# Altium PCB Science.PcbDoc (part 1 of 2)
Units mil, origin at the board's own origin, x right, y up, seen from the top; angles counter-clockwise.
Board outline 8250 x 3500 mil, 2 copper layers (Top Layer, Bottom Layer); 137 components, 126 nets, 701 pads, 227 vias.
Unrouted connection lines stored in the file: 22.
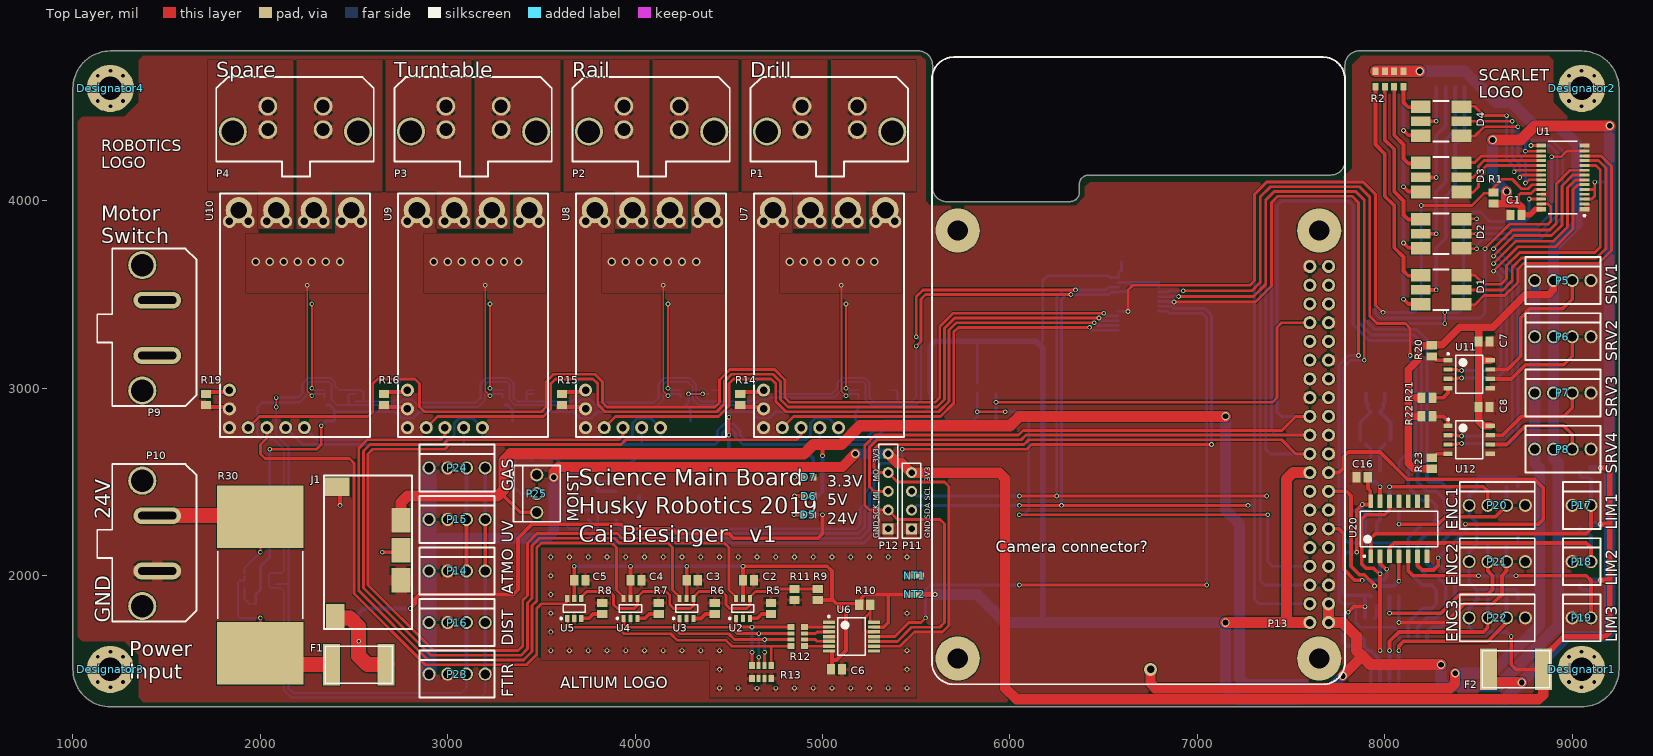
[diagram p0: Top Layer view]
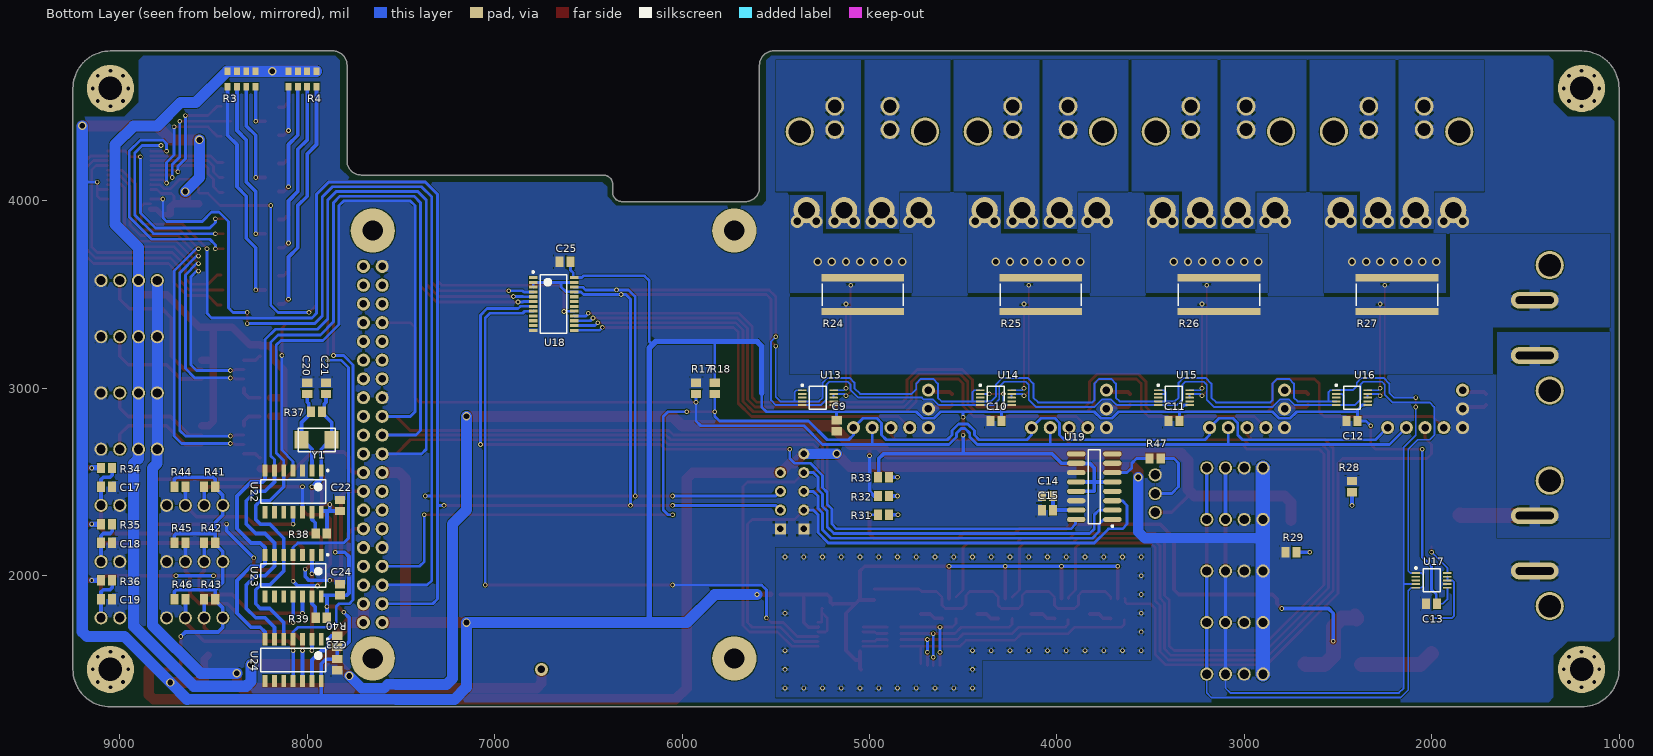
[diagram p1: Bottom Layer view, seen from below]

## Layer stack, top to bottom
Top Solder: solder mask 0.4, Solder Resist, Dk 3.5
Top Layer: signal copper 1.4
Dielectric 1: dielectric 12.6, FR-4, Dk 4.8
Bottom Layer: signal copper 1.4
Bottom Solder: solder mask 0.4, Solder Resist, Dk 3.5

## Board outline
1200,1300 cw(c1200,1500) 1000,1500 1000,4600 cw(c1200,4600) 1200,4800 5511.61,4800 cw(c5511.61,4725) 5586.61,4725 5586.61,4071.06 ccw(c5661.61,4071.06) 5661.61,3996.06 6320.08,3996.06 ccw(c6320.08,4046.06) 6370.08,4046.06 6370.08,4087.8 cw(c6420.08,4087.8) 6420.08,4137.8 7712.4,4137.8 ccw(c7712.4,4212.8) 7787.4,4212.8 7787.4,4725 cw(c7862.4,4725) 7862.4,4800 9050,4800 cw(c9050,4600) 9250,4600 9250,1500 cw(c9050,1500) 9050,1300

## Design rules (kind name [scope] priority, off if disabled: settings)
Clearance [All] p1: gap=5 ignorepadtopadclearanceinfootprint=FALSE except(0: Arc-Hole Track-Hole SMDPad-Hole THPad-Hole Via-Hole Fill-Hole Poly-Hole Region-Hole Text-Hole)
PolygonConnect PolygonConnect_Small [InNet('AGND')] p1: connectstyle=Relief reliefconductorwidth=20 reliefentries=4 polygonreliefangle="90 Angle" airgapwidth=10
PolygonConnect PolygonConnect_Motors [InComponent('U7') Or InComponent('U8') Or InComponent('U9') Or InComponent('U10')] p2: connectstyle=Direct reliefconductorwidth=10 reliefentries=4 polygonreliefangle="90 Angle" airgapwidth=10
PolygonConnect [All] p3: connectstyle=Relief reliefconductorwidth=60 reliefentries=4 polygonreliefangle="90 Angle" airgapwidth=10
RoutingVias [All] p1: holewidth=15 width=25 viastyle="Through Hole" minholewidth=10 minwidth=25 maxholewidth=30 maxwidth=50
SolderMaskExpansion [All] p1: expansion=4
Width Width_5V [InNet('+5')] p1: maxlimit=150 minlimit=10 preferedwidth=80 minimp=50.000000 maximp=50.000000 favimp=50.000000
Width Width_12V [InNet('+12')] p2: maxlimit=150 minlimit=10 preferedwidth=80 minimp=50.000000 maximp=50.000000 favimp=50.000000
Width [All] p3: maxlimit=100 minlimit=10 preferedwidth=20 minimp=50.000000 maximp=50.000000 favimp=50.000000
30 further rules are at their usual default settings.

## Classes and differential pairs
component class SensorInt: C16 C17 C18 C19 C20 C21 C22 C23 C24 P17 P18 P19 P20 P21 P22 R34 R35 R36 R37 R38 R39 R40 R41 R42 R43 R44 R45 R46 U20 U22 U23 U24 Y1
component class SensorExt: C14 C15 P14 P15 P16 P23 P24 P25 R47 U19
component class Science: C25 D5 D6 D7 P11 P12 P13 R31 R32 R33 U18
component class Power: C9 C10 C11 C12 C13 F1 F2 J1 P9 P10 R24 R25 R26 R27 R28 R29 R30 U13 U14 U15 U16 U17
component class Motors: C7 C8 P1 P2 P3 P4 P5 P6 P7 P8 R14 R15 R16 R17 R18 R19 R20 R21 R22 R23 U7 U8 U9 U10 U11 U12
component class Drivers: C1 C2 C3 C4 C5 C6 D1 D2 D3 D4 NT1 NT2 R1 R2 R3 R4 R5 R6 R7 R8 R9 R10 R11 R12 R13 U1 U2 U3 U4 U5 U6

## Components (designator, comment, footprint, x,y, rotation, side; value= is the part's Value field where it differs from the comment)
C1 "Cap" C0805 8700,3925 r0 top value=100nF
C2 "Cap" C0805 4604.53,1975 r180 top value=100nF
C3 "Cap" C0805 4304.53,1975 r180 top value=100nF
C4 "Cap" C0805 4004.53,1975 r180 top value=100nF
C5 "Cap" C0805 3704.53,1975 r180 top value=100nF
C6 "Cap" C0805 5075,1500 r180 top value=100nF
C7 "Cap" C0805 8529.53,3250 r180 top value=100pF
C8 "Cap" C0805 8529.53,2900 r180 top value=100pF
C9 "Cap" C0805 5175,2800 r90 bottom value=100nF
C10 "Cap" C0805 4325,2825 r180 bottom value=100nF
C11 "Cap" C0805 3375,2825 r180 bottom value=100nF
C12 "Cap" C0805 2425,2825 r180 bottom value=100nF
C13 "Cap" C0805 2000,1850 r180 bottom value=100nF
C14 "Cap" C0805 4050,2425 r180 bottom value=10uF
C15 "Cap" C0805 4050,2350 r180 bottom value=100nF
C16 "Cap" C0805 7879.53,2525 r180 top value=100nF
C17 "Cap" C0805 9070.47,2475 r0 bottom value=1uF
C18 "Cap" C0805 9070.47,2175 r0 bottom value=1uF
C19 "Cap" C0805 9070.47,1875 r0 bottom value=1uF
C20 "Cap" C0805 8000,3000 r270 bottom value=18pF
C21 "Cap" C0805 7900,3000 r270 bottom value=18pF
C22 "Cap" C0805 7825,2375 r90 bottom value=100nF
C23 "Cap" C0805 7840,1525 r270 bottom value=100nF
C24 "Cap" C0805 7825,1925 r90 bottom value=100nF
C25 "Cap" C0805 6625,3675 r180 bottom value=100nF
D1 "RGB_LED" SLV6A-FKB 8300,3525 r180 top
D2 "RGB_LED" SLV6A-FKB 8300,3825 r180 top
D3 "RGB_LED" SLV6A-FKB 8300,4125 r180 top
D4 "RGB_LED" SLV6A-FKB 8300,4425 r180 top
D5 "LED0" 1608[0603] 4922.44,2325 r0 top
D6 "LED0" 1608[0603] 4925,2425 r0 top
D7 "LED0" 1608[0603] 4925,2525 r0 top
Designator1 "Comment" HOLE-M3 9050,1500 r0 top
Designator2 "Comment" HOLE-M3 9050,4600 r0 top
Designator3 "Comment" HOLE-M3 1200,1500 r0 top
Designator4 "Comment" HOLE-M3 1200,4600 r0 top
F1 "2A" 2920 2525,1525 r180 top
F2 "1A" 2920 8700,1500 r0 top
J1 "OKI-T/3-W40" OKI-T/3-W40 2750,2135 r90 top
NT1 "NETTIE-SMT2-W0.8L2.0(MM)" NETTIE-SMT2-W0.8L2.0(MM) 5500,2000 r0 top net-tie
NT2 "NETTIE-SMT2-W0.8L2.0(MM)" NETTIE-SMT2-W0.8L2.0(MM) 5500,1900 r0 top net-tie
P1 "Drill Motor" Sabre-2pos 5185,4380 r0 top
P2 "Rail Motor" Sabre-2pos 4235,4380 r0 top
P3 "Turntable Motor" Sabre-2pos 3285,4380 r0 top
P4 "Motor 4" Sabre-2pos 2335,4380 r0 top
P5 "Servo 1" 22-23-20x1-4pos 8800,3575 r180 top
P6 "Servo 2" 22-23-20x1-4pos 8800,3275 r180 top
P7 "Servo 3" 22-23-20x1-4pos 8800,2975 r180 top
P8 "Servo 4" 22-23-20x1-4pos 8800,2675 r180 top
P9 "Motor Power Switch" SuperSabre-2pos 1380,3175 r270 top
P10 "Power Input" SuperSabre-2pos 1380,2025 r270 top
P11 "I2C Test" HDR1X4 5475,2250 r90 top
P12 "SPI Test" HDR1X5 5350,2250 r90 top
P13 "RPi Header" RPi-3B+ 7650,2700 r270 top
P14 "Atmospheric (BME280)" 22-23-20x1-4pos 2900,2025 r180 top
P15 "UV (VEML6070)" 22-23-20x1-4pos 2900,2300 r180 top
P16 "Dist (VL53L0X)" 22-23-20x1-4pos 2900,1750 r180 top
P17 "LimSw 1" 22-23-20x1-2pos 9000,2375 r180 top
P18 "LimSw 2" 22-23-20x1-2pos 9000,2075 r180 top
P19 "LimSw 3" 22-23-20x1-2pos 9000,1775 r180 top
P20 "Encoder 1" 22-23-20x1-4pos 8450,2375 r180 top
P21 "Encoder 2" 22-23-20x1-4pos 8450,2075 r180 top
P22 "Encoder 3" 22-23-20x1-4pos 8450,1775 r180 top
P23 "FTIR (SWS62231)" 22-23-20x1-4pos 2900,1475 r180 top
P24 "Gas (iAQ-Core)" 22-23-20x1-4pos 2900,2575 r180 top
P25 "Header 3" 22-23-20x1-3pos 3475,2338 r270 top
R1 "Res3" C0805 8580,4015 r90 top value=10K
R2 "RESNET_4" 744C083 8025,4650 r270 top value=150
R3 "RESNET_4" 744C083 8350,4650 r270 bottom value=100
R4 "RESNET_4" 744C083 8025,4650 r270 bottom value=100
R5 "Res3" C0805 4725,1825 r90 top value=156,250
R6 "Res3" C0805 4425,1825 r90 top value=156,250
R7 "Res3" C0805 4125,1825 r90 top value=156,250
R8 "Res3" C0805 3825,1825 r90 top value=156,250
R9 "Res3" C0805 4975,1900 r90 top value=976
R10 "Res3" C0805 5225,1844.69 r180 top value=10K
R11 "Res3" C0805 4850,1900 r270 top value=182
R12 "RESNET_4" CAY16F4 4868,1675 r0 top value=15K
R13 "RESNET_4" CAY16F4 4675,1485.63 r90 top value=10K
R14 "Res3" C0805 4560,2940 r270 top value=47K
R15 "Res3" C0805 3610,2940 r270 top value=100K
R16 "Res3" C0805 2660,2940 r270 top value=47K
R17 "Res3" C0805 5925,3000 r270 bottom value=10K
R18 "Res3" C0805 5825,3000 r90 bottom value=10K
R19 "Res3" C0805 1710,2940 r270 top value=47K
R20 "Res3" C0805 8250,3200 r270 top value=1.8K
R21 "Res3" C0805 8225,2950 r0 top value=1.8K
R22 "Res3" C0805 8225,2850 r0 top value=1.8K
R23 "Res3" C0805 8250,2600 r90 top value=1.8K
R24 "Res3" FCSL110 5035,3500 r270 bottom value=5m
R25 "Res3" FCSL110 4085,3500 r270 bottom value=5m
R26 "Res3" FCSL110 3135,3500 r270 bottom value=5m
R27 "Res3" FCSL110 2185,3500 r270 bottom value=5m
R28 "Res3" C0805 2425,2475 r270 bottom value=10K
R29 "Res3" C0805 2750,2125 r180 bottom value=1.47K
R30 "Res3" RW5S0 2000,1950 r90 top value=100m
R31 "Res3" C0805 4925,2325 r0 bottom value=1.2K
R32 "Res3" C0805 4925,2425 r0 bottom value=180
R33 "Res3" C0805 4925,2525 r0 bottom value=68
R34 "Res3" C0805 9070.47,2575 r180 bottom value=5K
R35 "Res3" C0805 9070.47,2275 r180 bottom value=5K
R36 "Res3" C0805 9070.47,1975 r180 bottom value=5K
R37 "Res3" C0805 7950,2875 r180 bottom value=1M
R38 "Res3" C0805 7925,2225 r0 bottom value=10K
R39 "Res3" C0805 7925,1775 r0 bottom value=10K
R40 "Res3" C0805 7840,1650 r90 bottom value=10K
R41 "Res3" C0805 8520.47,2475 r180 bottom value=10K
R42 "Res3" C0805 8520.47,2175 r180 bottom value=10K
R43 "Res3" C0805 8520.47,1875 r180 bottom value=10K
R44 "Res3" C0805 8679.53,2475 r0 bottom value=10K
R45 "Res3" C0805 8679.53,2175 r0 bottom value=10K
R46 "Res3" C0805 8679.53,1875 r0 bottom value=10K
R47 "Res3" C0805 3475,2625 r180 bottom value=100
U1 "PCA9685PW,118" SOT361-1_V 8950,4125 r180 top
U2 "LTC6992" LTC6992 4575,1825 r90 top
U3 "LTC6992" LTC6992 4275,1825 r90 top
U4 "LTC6992" LTC6992 3975,1825 r90 top
U5 "LTC6992" LTC6992 3675,1825 r90 top
U6 "4ch DAC" MAX5715 5153.63,1675 r0 top
U7 "Pololu G2 HPMD" Pololu-HPMDG2-SCIENCE 5335,3950 r180 top
U8 "Pololu G2 HPMD" Pololu-HPMDG2-SCIENCE 4385,3950 r180 top
U9 "Pololu G2 HPMD" Pololu-HPMDG2-SCIENCE 3435,3950 r180 top
U10 "Pololu G2 HPMD" Pololu-HPMDG2-SCIENCE 2485,3950 r180 top
U11 "ACPL-064L-500E" ACPL-064L 8450,3075 r0 top
U12 "ACPL-064L-500E" ACPL-064L 8450,2725 r0 top
U13 "INA226AIDGSR" DGS0010A_L 5275,2950 r180 bottom
U14 "INA226AIDGSR" DGS0010A_L 4325,2950 r180 bottom
U15 "INA226AIDGSR" DGS0010A_L 3375,2950 r180 bottom
U16 "INA226AIDGSR" DGS0010A_L 2425,2950 r180 bottom
U17 "INA226AIDGSR" DGS0010A_L 2000,1975 r180 bottom
U18 "PCA9535EDTR2G" ONSC-TSSOP-24-948H_V 6685,3450 r180 bottom
U19 "TLV2544ID" TI-D16_M 3800,2475 r0 bottom
U20 "SN74HC14NSR" NS0014A_M 8075,2250 r90 top
U22 "LS7366R" SOIC14N 8075,2450 r270 bottom
U23 "LS7366R" SOIC14N 8075,2000 r270 bottom
U24 "LS7366R" SOIC14N 8075,1550 r270 bottom
Y1 "20MHz" ABM3 7950,2725 r0 bottom

## Footprints (in the part's own frame and the unit in brackets; to place one, negate y for a bottom-side part, rotate by r counter-clockwise, add the part's x,y. Pads: shape width x height; smd on the part's side, far side on the other; paste and mask are expansions set on the pad)
22-23-20x1-2pos [mil]
  round 70 hole 50: 1(0,0) 2(-100,0)
  silkscreen extent -150,-125 50,125
22-23-20x1-3pos [mil]
  round 70 hole 50: 1(0,0) 2(-100,0) 3(-200,0)
  silkscreen extent -250,-125 50,125
22-23-20x1-4pos [mil]
  round 70 hole 50: 1(0,0) 2(-100,0) 3(-200,0) 4(-300,0)
  silkscreen extent -350,-125 50,125
744C083 [mm] "Chip Array, Concave, 8-Leads, Pitch 1.27mm,  Body 5.08x2.00mm,  IPC Medium Density"
  rect 1.05x0.8 smd: 1(-1.05,1.905) 2(-1.05,0.635) 3(-1.05,-0.635) 4(-1.05,-1.905) 5(1.05,-1.905) 6(1.05,-0.635) 7(1.05,0.635) 8(1.05,1.905)
  body extent -1.15,-2.64 1.15,2.64, height 0.8
1608[0603] [mm] "Chip Capacitor, Body 1.6x0.8mm, IPC High Density"
  rect 0.8x0.9 smd: 1(-0.7,0) 2(0.7,0)
  body extent -0.87,-0.48 0.87,0.48, height 1.3
2920 [mm]
  rect 2.3x5.6 smd: 1(-3.7,0) 2(3.7,0)
  silkscreen extent -4.55,-2.5 4.55,2.5
ABM3 [mm]
  rect 1.9x2.4 smd: 1(-2.05,0) 2(2.05,0)
  silkscreen extent -2.5,-1.6 2.5,1.6
ACPL-064L [mm] "SOIC, 8-Leads, Body 5.08x3.93mm, Pitch 1.27mm, IPC Medium Density"
  rect 1.25x0.6 smd: 1(-2.85,1.905) 2(-2.85,0.635) 3(-2.85,-0.635) 4(-2.85,-1.905) 5(2.85,-1.905) 6(2.85,-0.635) 7(2.85,0.635) 8(2.85,1.905)
  silkscreen extent -2.97,-2.6 1.82,2.88, body extent -3,-2.6 3,2.6, height 3.2
C0805 [mm] "Chip Capacitor, Body 2.0x1.3mm, IPC High Density"
  rect 1.1x1.4 smd: 1(-0.75,0) 2(0.75,0)
  body extent -1.1,-0.72 1.1,0.72, height 1.4
CAY16F4 [mm]
  rect 0.95x0.8 smd: 1(-0.9,1.3) 4(-0.9,-1.3) 5(0.9,-1.3) 8(0.9,1.3)
  rect 0.95x0.55 smd: 2(-0.9,0.4) 3(-0.9,-0.4) 6(0.9,-0.4) 7(0.9,0.4)
  body extent -0.95,-1.7 0.95,1.7, height 0.6
DGS0010A_L [mm] "SOP, 10-Leads, Body 3.1x3.1mm, Pitch 0.5mm, IPC High Density"
  rrect40% 1.15x0.25 smd: 1(-2.125,1) 2(-2.125,0.5) 3(-2.125,0) 4(-2.125,-0.5) 5(-2.125,-1) 6(2.125,-1) 7(2.125,-0.5) 8(2.125,0) 9(2.125,0.5) 10(2.125,1)
  silkscreen extent -2.25,-1.55 1.15,1.8, body extent -2.45,-1.5 2.45,1.5, height 0.94
FCSL110 [mm]
  rect 1x11.2 smd: 1(-2.3,0) 2(2.3,0)
  silkscreen extent -1.5,-5.5 1.5,5.5
HDR1X4 [mm] "Connector; Header; 4 Position"
  rect 1.5x1.5 hole 0.9: 1(0,0)
  round 1.5 hole 0.9: 2(2.54,0) 3(5.08,0) 4(7.62,0)
  silkscreen extent -1.27,-1.27 8.89,1.27
HDR1X5 [mm] "Connector; Header; 5 Position"
  rect 1.5x1.5 hole 0.9: 1(0,0)
  round 1.5 hole 0.9: 2(2.54,0) 3(5.08,0) 4(7.62,0) 5(10.16,0)
  silkscreen extent -1.27,-1.27 11.43,1.27
HOLE-M3 [mm]
  round 0.8 hole 0.5: ""(-2.4,0) ""(-1.697,-1.697) ""(-1.697,1.697) ""(0,-2.4) ""(0,2.4) ""(1.697,-1.697) ""(1.697,1.697) ""(2.4,0)
  round 6.4 hole 3.2: ""(0,0)
LTC6992 [mm] "SOT23, 6-Leads, Body 2.90x2.80mm, Pitch 0.95mm, IPC Medium Density"
  rect 0.95x0.55 smd: 1(-1.35,0.95) 2(-1.35,0) 3(-1.35,-0.95) 4(1.35,-0.95) 5(1.35,0) 6(1.35,0.95)
  silkscreen extent -1.47,-1.5 0.5,1.9, body extent -1.45,-1.5 1.45,1.5, height 1
MAX5715 [mm] "TSOP, 14-Leads, Body 5.00x4.40mm, Pitch 0.65mm, IPC Low Density"
  rect 1.6x0.45 smd: 1(-3.05,1.95) 2(-3.05,1.3) 3(-3.05,0.65) 4(-3.05,0) 5(-3.05,-0.65) 6(-3.05,-1.3) 7(-3.05,-1.95) 8(3.05,-1.95) 9(3.05,-1.3) 10(3.05,-0.65) 11(3.05,0) 12(3.05,0.65) 13(3.05,1.3) 14(3.05,1.95)
  silkscreen extent -3.17,-2.55 1.85,2.85, body extent -3.2,-2.55 3.2,2.55, height 1.1
NETTIE-SMT2-W0.8L2.0(MM) [mil] "Net-Tie, Surface Mount, 2.0mm x 0.8mm, 2 Pads(1.2mm x 0.8mm)"
  rect 52x31.5 smd paste-52 mask-19.68: 1(-35.08,0.24) 2(16.1,0.24)
NS0014A_M [mm] "SOIC,14-Leads,Body 10.5x5.6mm,Pitch 1.27mm,IPC Low Density"
  rrect15% 1.85x0.65 smd: 1(-3.725,3.81) 2(-3.725,2.54) 3(-3.725,1.27) 4(-3.725,0) 5(-3.725,-1.27) 6(-3.725,-2.54) 7(-3.725,-3.81) 8(3.725,-3.81) 9(3.725,-2.54) 10(3.725,-1.27) 11(3.725,0) 12(3.725,1.27) 13(3.725,2.54) 14(3.725,3.81)
  silkscreen extent -3.85,-5.25 2.4,5.25, body extent -2.8,-5.25 2.8,5.25, height 2
OKI-T/3-W40 [mil]
  rect 100x130 smd: 1(340,340)
  rect 130x100 smd: 2(-350,350) 3(-160,0) 4(0,0) 5(160,0)
  silkscreen extent -420,-60 400,410
ONSC-TSSOP-24-948H_V [mm] "SOP, 24-Leads, Body 7.9x4.5mm, Pitch 0.65mm"
  rect 1.15x0.42 smd: 1(-2.775,3.575) 2(-2.775,2.925) 3(-2.775,2.275) 4(-2.775,1.625) 5(-2.775,0.975) 6(-2.775,0.325) 7(-2.775,-0.325) 8(-2.775,-0.975) 9(-2.775,-1.625) 10(-2.775,-2.275) 11(-2.775,-2.925) 12(-2.775,-3.575) 13(2.775,-3.575) 14(2.775,-2.925) 15(2.775,-2.275) 16(2.775,-1.625) 17(2.775,-0.975) 18(2.775,-0.325) 19(2.775,0.325) 20(2.775,0.975) 21(2.775,1.625) 22(2.775,2.275) 23(2.775,2.925) 24(2.775,3.575)
  silkscreen extent -2.9,-3.95 1.8,4.46, body extent -2.25,-3.95 2.25,3.95, height 1.2
Pololu-HPMDG2-SCIENCE [mil]
  round 70 hole 40: 1(650,1160) 2(550,1160) 3(450,1160) 4(350,1160) 5(250,1160) 9(650,1060) 10(650,960) 13(550,60) 13(650,60) 14(350,60) 14(450,60) 15(150,60) 15(250,60) 16(-50,60) 16(50,60)
  round 140 hole 90: 13(600,0) 14(400,0) 15(200,0) 16(0,0)
  silkscreen extent -100,-90 700,1210
RPi-3B+ [mil]
  round 70 hole 40: 1(950,-50) 2(950,50) 3(850,-50) 4(850,50) 5(750,-50) 6(750,50) 7(650,-50) 8(650,50) 9(550,-50) 10(550,50) 11(450,-50) 12(450,50) 13(350,-50) 14(350,50) 15(250,-50) 16(250,50) 17(150,-50) 18(150,50) 19(50,-50) 20(50,50) 21(-50,-50) 22(-50,50) 23(-150,-50) 24(-150,50) 25(-250,-50) 26(-250,50) 27(-350,-50) 28(-350,50) 29(-450,-50) 30(-450,50) 31(-550,-50) 32(-550,50) 33(-650,-50) 34(-650,50) 35(-750,-50) 36(-750,50) 37(-850,-50) 38(-850,50) 39(-950,-50) 40(-950,50)
  round 236.22 hole 108.27: ""(-1141.73,0) ""(-1141.73,-1929.13) ""(1141.73,0) ""(1141.73,-1929.13)
  silkscreen extent -2067,-2067 1280,138
RW5S0 [mm] "Chip Resistor, 2-Leads, Body 20.50x9.20mm, IPC Low Density"
  rect 8.5x11.7 smd: 1(-9.25,0) 2(9.25,0)
  silkscreen extent -4.6,-5.75 4.6,5.75, body extent -10.5,-4.85 10.5,4.85, height 10.8
Sabre-2pos [mil]
  round 100 hole 70: 1(0,0) 1(0,125) 2(-295,0) 2(-295,125)
  round 150 hole 120: ""(-482,-10) ""(187,-10)
  silkscreen extent -570,-250 270,280
SLV6A-FKB [mm]
  rect 2.7x1.7 smd: 1(-2.75,1.975) 3(-2.75,-1.975) 4(2.75,-1.975) 6(2.75,1.975)
  rect 2.7x1.3 smd: 2(-2.75,0) 5(2.75,0)
  silkscreen extent -1,-2.75 1,2.75
SOIC14N [mm]
  rect 1.65x0.65 smd: 1(-2.825,3.81) 2(-2.825,2.54) 3(-2.825,1.27) 4(-2.825,0) 5(-2.825,-1.27) 6(-2.825,-2.54) 7(-2.825,-3.81) 8(2.825,-3.81) 9(2.825,-2.54) 10(2.825,-1.27) 11(2.825,0) 12(2.825,1.27) 13(2.825,2.54) 14(2.825,3.81)
  silkscreen extent -2.95,-4.4 1.6,4.81, body extent -3,-4.4 3,4.4, height 1.8
SOT361-1_V [mm] "SOP, 28-Leads, Body 9.7x4.4mm, Pitch 0.65mm, NXP Recommended"
  rect 1.35x0.6 smd: 1(-2.925,4.325) 14(-2.925,-4.325) 15(2.925,-4.325) 28(2.925,4.325)
  rect 1.35x0.4 smd: 2(-2.925,3.575) 3(-2.925,2.925) 4(-2.925,2.275) 5(-2.925,1.625) 6(-2.925,0.975) 7(-2.925,0.325) 8(-2.925,-0.325) 9(-2.925,-0.975) 10(-2.925,-1.625) 11(-2.925,-2.275) 12(-2.925,-2.925) 13(-2.925,-3.575) 16(2.925,-3.575) 17(2.925,-2.925) 18(2.925,-2.275) 19(2.925,-1.625) 20(2.925,-0.975) 21(2.925,-0.325) 22(2.925,0.325) 23(2.925,0.975) 24(2.925,1.625) 25(2.925,2.275) 26(2.925,2.925) 27(2.925,3.575)
  silkscreen extent -3.05,-4.9 1.96,5.3, body extent -2.2,-4.85 2.2,4.85, height 1.1
SuperSabre-2pos [mil]
  oval 90x255 hole 40 slot 205 at 90 deg: 1(0,70) 2(-295,70)
  round 150 hole 120: ""(-482,-10) ""(187,-10)
  silkscreen extent -570,-250 270,280
TI-D16_M [mm] "SOIC, 16-Leads, Body 9.9x3.9mm, Pitch 1.27mm, IPC Low Density"
  oval 2.5x0.7 smd: 1(-2.45,4.445) 2(-2.45,3.175) 3(-2.45,1.905) 4(-2.45,0.635) 5(-2.45,-0.635) 6(-2.45,-1.905) 7(-2.45,-3.175) 8(-2.45,-4.445) 9(2.45,-4.445) 10(2.45,-3.175) 11(2.45,-1.905) 12(2.45,-0.635) 13(2.45,0.635) 14(2.45,1.905) 15(2.45,3.175) 16(2.45,4.445)
  silkscreen extent -2.57,-5 0.8,5.47, body extent -2,-5 2,5, height 1.75

## Part data
C1 C2 C3 C4 C5 C6 C7 C8 C9 C10 C11 C12 C13 C14 C15 C16 C17 C18 C19 C20 C21 C22 C23 C24 C25: "Capacitor", LatestRevisionDate=17-Jul-2002, LatestRevisionNote="Re-released for DXP Platform.", PackageDescription="Radial Cap, Thru-Hole; 2 Leads; 0.3 in Pin Spacing", PackageReference=RAD-0.3, Published=8-Jun-2000, Publisher="Altium Limited"
D1 D2 D3 D4: "RGB LED"
D5 D6 D7: "Typical INFRARED GaAs LED", LatestRevisionDate=08-Jul-2005, LatestRevisionNote="Mech Layer 1 removed.", PackageDescription="LED; 2 Leads", PackageReference=LED-0, Published=8-Jun-2000, Publisher="Altium Limited"
F1 F2: library part "Fuse Thermal", "Thermal Fuse", LatestRevisionDate=17-Jul-2002, LatestRevisionNote="Re-released for DXP Platform.", PackageDescription="Thru-Hole; 2 Leads", PackageReference=PIN-W2/E2.8, Published=24-Mar-1999, Publisher="Altium Limited"
J1: "Adjustable Output 3-Amp DOSA-SMT DC/DC Converters", ComponentLink1Description=Datasheet, ComponentLink1URL=https://power.murata.com/data/power/oki-t3-w40.pdf
NT1 NT2: library part CMP-0488-00002-2, "Net-Tie, Surface Mount, 2.0 mm x 0.8 mm, 2 Pads (1.2 mm x 0.8 mm)", Manufacturer="No Vendor", PartNumber=NETTIE-SMT2-W0.8L2.0(MM)
P1 P2 P3 P4 P9 P10 P17 P18 P19: library part "Header 2", "Header, 2-Pin", LatestRevisionDate=17-Jul-2002, LatestRevisionNote="Re-released for DXP Platform.", Publisher="Altium Limited"
P5 P6 P7 P8 P11 P14 P15 P16 P20 P21 P22 P23 P24: library part "Header 4", "Header, 4-Pin", LatestRevisionDate=17-Jul-2002, LatestRevisionNote="Re-released for DXP Platform.", Publisher="Altium Limited"
P12: library part "Header 5", "Header, 5-Pin", LatestRevisionDate=17-Jul-2002, LatestRevisionNote="Re-released for DXP Platform.", Publisher="Altium Limited"
P13: library part "Header 20X2", "Header, 20-Pin, Dual row", LatestRevisionDate=17-Jul-2002, LatestRevisionNote="Re-released for DXP Platform.", Publisher="Altium Limited"
P25: "Header, 3-Pin", LatestRevisionDate=17-Jul-2002, LatestRevisionNote="Re-released for DXP Platform.", Publisher="Altium Limited"
R1 R5 R6 R7 R8 R9 R10 R11 R14 R15 R16 R17 R18 R19 R20 R21 R22 R23 R24 R25 R26 R27 R28 R29 R30 R31 R32 R33 R34 R35 R36 R37 R38 R39 R40 R41 R42 R43 R44 R45 R46 R47: "Resistor", LatestRevisionDate=29-May-2009, LatestRevisionNote="IPC-7351 Footprint Added.", PackageDescription="Chip Resistor", PackageReference=J1-0603, Published=8-Jun-2000, Publisher="Altium Limited"
R2 R3 R4 R12 R13: "4-Resistor Network"
U1: library part CMP-1595-00003-2, "16-Channel, 12-Bit PWM Fm+ I2C-Bus LED Controller, 2.3 to 5.5 V, -40 to 85 degC, 28-Pin TSSOP (SOT361-1), RoHS, Tape and Reel", Frequency="25000000 Hz", PartNumber=PCA9685, Supply Current Max="10 mA", Supply Voltage Max="5.5 V", Supply Voltage Min="2.3 V", Temperature Max="85 degC", Temperature Min="-40 degC", Code_JEDEC=MO-153, ComponentLink1Description="Manufacturer URL", ComponentLink1URL=http://www.nxp.com/, ComponentLink2Description=Datasheet, ComponentLink2URL=http://www.nxp.com/documents/data_sheet/PCA9685.pdf, ComponentLink3Description="Package Specification", ComponentLink3URL=http://www.nxp.com/documents/outline_drawing/sot361-1_po.pdf, DatasheetVersion="Rev. 4", Mounting Technology="Surface Mount", PackageDescription="28-Pin Small Outline Package, Body 9.7 x 4.4 mm, Pitch 0.65 mm", PackageVersion=02/2003, Packing="Tape and Reel", RoHS=TRUE
U2 U3 U4 U5: "Voltage-Controlled Pulse  / Width Modulator (PWM)"
U6: library part MAX5715, "Ultra-Small, Quad-Channel, 8-/10-/12-Bit Buffered  / Output DACs with Internal Reference and SPI Interface"
U7 U8 U9 U10: library part Pololu-G2HPMD, "Discrete MOSFET H-bridge", ComponentLink1Description=Website, ComponentLink1URL=https://www.pololu.com/product/2995
U11 U12: "Low-Power 10-MBd Digital CMOS Optocouplers"
U13 U14 U15 U16 U17: library part CMP-0704-00058-2, "High-Side Measurement, Bi-Directional Current / Power Monitor with I2C Interface, 2.7 to 5.5 V, -40 to 125 degC, 10-pin SOP (DGS10), Green (RoHS & no Sb/Br)", Quiescent Current (+/-)(Typ)(mA)=0.33, Rating=Catalog, CMRR(Min)(dB)=126, Code_JEDEC=MO-153, Common Mode Range(Max)(V)=36, Common Mode Range(Min)(V)=0, ComponentLink1Description="Manufacturer URL", ComponentLink1URL=http://www.ti.com/, ComponentLink2Description=Datasheet, ComponentLink2URL=http://www.ti.com/general/docs/lit/getliterature.tsp?genericPartNumber=INA226&fileType=pdf, ComponentLink3Description="Package Specification", ComponentLink3URL=http://www.ti.com/lit/ml/mpds035b/mpds035b.pdf, DatasheetVersion=SBOS547, Eco-Plan="Green (RoHS & no Sb/Br)", Gain(V/V)=1, Input Offset (+/-)(Max)(uV)=10, Input Offset Drift (+/-)(Max)(uV/Degrees Celsius)=0.1, Mounting Technology="Surface Mount", PackageDescription="10-Pin Plastic Small Outline, Body 3 x 3 mm, Pitch 0.5 mm", PackageReference=DGS0010A, PackageVersion="4073272/C, 02/2004", PartNumber=INA226AIDGSR, Small-Signal Bandwidth(Typ)(MHz)=0.007, SubFamily="Current Shunt Monitor", Vs(Max)(V)=5.5, Vs(Min)(V)=2.7
U18: library part CMP-1316-00043-1, "16-Bit Low-Power I/O Expander for I2C Bus with Interrupt, 1.65 to 5.5 V, -55 to 125 degC, 24-Pin TSSOP, Pb-Free, Tape and Reel", Manufacturer="On Semiconductor", ComponentLink1Description="Manufacturer URL", ComponentLink1URL=http://www.onsemi.com/, ComponentLink2Description=Datasheet, ComponentLink2URL=http://www.onsemi.com/pub_link/Collateral/PCA9535E-D.PDF, ComponentLink3Description="Package Specification", ComponentLink3URL=http://www.onsemi.cn/pub_link/Collateral/948H-01.PDF, DatasheetVersion="Rev. 5", I/O=16, LED Blink/PWM=No, Mounting Technology="Surface Mount", PackageDescription="24-Pin Small Outline Package, Body 7.8 x 4.4 mm, Pitch 0.65 mm", PackageReference=TSSOP-24-948H, PackageVersion="Rev. B, 06/2012", Packing="Tape and Reel", PartNumber=PCA9535EDTR2G, RoHS=TRUE, VCC Max (V)=5.5, VCC Min (V)=1.65
U19: library part CMP-0003-01025-2, "12-Bit 200 kSPS ADC Serial Out, Auto Power Down (Software and Hardware), Low Power with 8 x FIFO with 4 Channel, -40 to 85 degC, 16-pin SOIC (D16), Green (RoHS & no Sb/Br)", Analog Voltage AV/DD(Max)(V)=5.5, Analog Voltage AV/DD(Min)(V)=2.7, Manufacturer="Texas Instruments", # Input Channels=4, Architecture=SAR, Code_JEDEC=MS-012, ComponentLink1Description="Manufacturer URL", ComponentLink1URL=http://www.ti.com/, ComponentLink2Description=Datasheet, ComponentLink2URL=http://www.ti.com/general/docs/lit/getliterature.tsp?genericPartNumber=TLV2544&fileType=pdf, ComponentLink3Description="Package Specification", ComponentLink3URL=http://www.ti.com/litv/pdf/mpds178g, DatasheetVersion=SLAS198E, Digital Supply(Max)(V)=5.5, Digital Supply(Min)(V)=2.7, Eco-Plan="Green (RoHS & no Sb/Br)", ENOB(Bits)=11.6, INL(Max)(+/-LSB)=1, Interface="Serial SPI", Mounting Technology="Surface Mount", PackageDescription="16-Pin Plastic Small Outline, Body 9.9 x 3.9 mm, Pitch 1.27 mm", PackageReference=D16, PackageVersion="4040047-6/M, 06/2011", PartNumber=TLV2544ID, Resolution(Bits)=12, Sample Rate (max)(SPS)=200k, SFDR(dB)=84, SINAD(dB)=70, SubFamily="Precision ADC (<=10MSPS)"
U20: library part CMP-1615-00079-5, "Hex Schmitt-Trigger Inverters, NS0014A, LARGE T&R", F @ Nom Voltage(Max)(Mhz)=20, Generic Part Number=SN74HC14, ICC @ Nom Voltage(Max)(mA)=0.02, Manufacturer="Texas Instruments", Operating Temperature Range(C)="-40 to 85", Rating=Catalog, tpd @ Nom Voltage(Max)(ns)=31, Voltage(Nom)(V)=5, Bits(#)=6, DatasheetVersion=SCLS085G, Input Type=CMOS, Output Drive (IOL/IOH)(Max)(mA)=-4/4, Output Type=CMOS, PackageReference=NS0014A, Schmitt Trigger=Yes, Technology Family=HC, VCC(Max)(V)=6, VCC(Min)(V)=2
U22 U23 U24: "32-BIT QUADRATURE COUNTER WITH SERIAL INTERFACE", ComponentLink1Description=Datasheet, ComponentLink1URL=https://lsicsi.com/pdfs/Data_Sheets/LS7366R.pdf
Y1: library part XTAL, "Crystal Oscillator", LatestRevisionDate=17-Jul-2002, LatestRevisionNote="Re-released for DXP Platform.", PackageDescription="Crystal, Thru-Hole; 2 Leads; Body 3.1 x 8.2 mm (Dia.xH)", PackageReference=R38, Published=8-Jun-2000, Publisher="Altium Limited"

## Via types
v1: diameter 25, hole 15, Top Layer to Bottom Layer, 184 vias
v2: diameter 45, hole 29, Top Layer to Bottom Layer, 28 vias
v3: diameter 45, hole 30, Top Layer to Bottom Layer, 11 vias
v4: diameter 25, hole 15, Top Layer to Bottom Layer, tented both sides, 2 vias
v5: diameter 70, hole 40, Top Layer to Bottom Layer, 1 vias
v6: diameter 45, hole 30, Top Layer to Bottom Layer, tented both sides, 1 vias

## Nets (pads, with @x,y where several pads share a name; then routed paths per layer and width w, separated by ;. In a path a pad name is that pad's centre, name@x,y a point inside that pad or via, vN(x,y) a via of type N, cw(c..) or ccw(c..) an arc to the next point about the centre after c; other vN are vias at no path point)
24V_IN: P9.1 P10.2 R30.2 U17.10 | length 577.4
  Top Layer w10: v1(2000,2125) R30.2@2000,2155
  Top Layer w80: P10.2@1450,2320 1845,2320 R30.2@1850,2325
  Bottom Layer w10: U17.10@1916.34,2014.37 1916.34,2041.34 v1(2000,2125)
+3.3: C1.2 C9.2 C10.2 C11.2 C12.2 C13.2 C16.1 C22.1 C23.1 C24.1 C25.2 F2.1 NT2.2 P13.1 P13.17 R1.1 R18.2 R33.2 R38.1 R39.1 R40.1 U1.3 U1.5 U1.24 U1.28 U13.6 U14.2 U14.6 U15.6 U16.6 U17.6 U18.24 U19.5 U19.10 U19.12 U19.13 U20.14 U22.14 U23.14 U24.14 | length 23083.4
  Top Layer w10: v4(4285,2970) v4(4360,2970)
  Top Layer w15: v1(2050,2675) 2300,2675 2325,2700 v1(2325,2800) ; 8710,3985 8710,4025 8725,4040 8780,4040 8800.65,4060.65 8834.47,4060.65 U1.24@8834.84,4061.02 ; U1.3@9065,4010 9105,4010 9120,4025 9120,4061.02 ; U1.5@9065.16,4061.02 9120,4061.02 ; v1(9120,4100) 9120,4061.02
  Top Layer w20: v1(4500,2750) v1(4500,2845) ; v1(7805,1805) 7835,1835 v1(7895,1835) ; v1(7850,2125) 7850,2350 v1(7880,2380) U20.14@7925,2380 ; C16.1@7910,2525 7910,2465 7922.2,2452.8 7922.2,2399.45 U20.14@7925,2396.65
  Top Layer w30: NT2.2@5525.92,1900 v1(5600,1900) ; 8709.53,3985.47 8710,3985 ; C1.2@8730,3925 8775,3925 8805,3955 8834.57,3955 U1.28@8834.84,3954.72
  Top Layer w40: F2.1@8529.05,1575 8550,1554.05 F2.1@8550,1500 ; R1.1@8580,3985.47 8709.53,3985.47 ; 8710,3985 8730,3965 C1.2@8730,3930
  Top Layer w60: v3(7150,1750) 7475,1750 ; P13.1@7600,1750 7475,1750 ; P13.17@7600,2550 7510.15,2550 7475,2514.85 7475,1750 ; F2.1@8554.33,1500 8554.33,1445.28 8569.61,1430 v3(8730,1430) ; v3(8575,4325) 8725,4325 8800,4400 v3(9200,4400) ; 8650,4000 v3(8650,4050)
  Bottom Layer w10: U17.6@1916.34,1935.63 1916.34,1873.66 1940,1850 C13.2@1970,1850 ; 4270,2910 4285,2925 v4(4285,2970) ; v4@4360.16,2969.84 U14.2@4393.52,2969.84
  Bottom Layer w15: C13.2@1975,1850 1975,1900 2000,1925 2000,2050 2050,2100 v1(2050,2675) ; v1(2325,2800) 2350,2825 C12.2@2395.47,2825 2395.47,2875 2720,2875 2755,2840 2815,2840 2850,2875 3345,2875 ; U16.6@2356.48,2910 2370,2910 2395.47,2884.53 2395.47,2875.47 ; U15.6@3306.48,2910 3320,2910 3345.47,2884.53 3345.47,2875 ; C11.2@3345.47,2825 3345.47,2875 ; 4270,2910 4295.47,2884.53 4295.47,2875 ; C10.2@4295.47,2825 4295.47,2875 ; v4(4360,2970) v4@4360.16,2969.84 ; v1(4500,2845) 4500,2875 ; C9.2@5175,2829.53 5175,2875 ; 5190,2905 5190,2890 5175,2875 ; 5575,2975 5575,2900 5550,2875 5175,2875 ; R18.2@5825,3029.53 5825,3250 ; 6160,3235 6175,3250 6175,3575 6200,3600 6525,3600 6533.48,3591.52 6574.98,3591.52 U18.24@6575.75,3590.75 6579.23,3590.75 6580,3591.52 6580,3615 6595,3630 C25.2@6595,3675 ; v1(9120,4100) 9200,4100 ; 3345.47,2875 3670,2875 3705,2840 3765,2840 3800,2875 4295.47,2875 ; 4295.47,2875 4500,2875 ; 4500,2875 4620,2875 4655,2840 4715,2840 4750,2875 5175,2875
  Bottom Layer w20: U19.5@3703.54,2500 3800,2500 ; U19.13@3896.46,2450 3800,2450 3800,2500 ; U19.12@3896.46,2500 3800,2500 ; v1(4500,2750) 4500,2650 ; R33.2@4950,2525 4950,2625 4925,2650 4500,2650 ; v1(7805,1805) 7805,1804.9 7775,1774.9 7775,1650 7800,1625 7835,1625 7840,1620 7840,1555 7840.47,1554.53 7900.47,1554.53 7925,1530 U24.14@7925,1438.78 7925,1340 ; C24.1@7825,1895 7825.47,1895.47 7922.2,1895.47 7925,1892.68 U23.14@7925,1888.78 ; C24.1@7825,1895.47 7824.53,1895 7790,1895 7777.5,1907.5 7777.5,2102.5 7800,2125 v1(7850,2125) ; C22.1@7825,2340 7830.47,2345.47 7880,2345.47 ; 7880,2345 7880,2345.47 ; v1(7880,2380) 7880,2345.47 ; 7895,1895 v1(7895,1835) 7895,1775.47 R39.1@7895.47,1775 ; 7895,2345 7895,2225.47 R38.1@7895.47,2225 ; U22.14@7925,2338.78 7925,2342.68 7922.2,2345.47 7880,2345.47 ; 3800,2500 3800,2575 3823.55,2598.55 3895.01,2598.55 U19.10@3896.46,2600 3975,2600 4025,2650 4500,2650
  Bottom Layer w30: 5575,2975 5575,3225 5600,3250 5825,3250 6139.85,3250 6175,3214.85 6175,1750
  Bottom Layer w55: 7525,1340 7925,1340 8640,1340
  Bottom Layer w60: v1(5600,1900) 5825,1900 5975,1750 6175,1750 v3(7150,1750) 7150,1405 7215,1340 7525,1340 ; v3(8575,4325) 8575,4125 v3(8650,4050) ; 8640,1340 v3(8730,1430) 8975,1675 9175,1675 9200,1700 9200,4100 v3(9200,4400)
+3.3SENS: F2.2 P11.4 P12.5 P14.1 P15.1 P16.1 P20.1 P21.1 P22.1 P23.1 P24.1 R34.1 R35.1 R36.1 R41.2 R42.2 R43.2 R44.2 R45.2 R46.2 | length 12591.6
  Top Layer w20: v1(8675,1675) 8675,1525 8700,1500 F2.2@8825,1500
  Top Layer w30: F2.2@8845.67,1500 8845.67,1564.96 8955.71,1675 9175,1675 9200,1700 9200,1975 ; v1(9150,1975) 9200,1975 ; v1(9150,2275) 9200,2275 ; v1(9150,2575) 9175,2575 9200,2550 9200,2275 ; 9200,1975 9200,2275
  Top Layer w55: v3(3565,2525) 3565,2555 3590,2580 5105,2580 v3(5175,2650) ; P12.5@5350,2650 5351.1,2650 5401.1,2600 5423.9,2600 5473.9,2550 P11.4@5475,2550 5942.78,2550 5975,2517.78 5975,1400 6035,1340 8820,1340 8845,1365 8845,1499.33 F2.2@8845.67,1500
  Bottom Layer w20: P22.1@8450,1750 8450,1725 8475,1700 8650,1700 v1(8675,1675) ; P22.1@8450,1775 8450,1828.15 8496.85,1875 R43.2@8500,1875 ; R41.2@8490,2475.94 8490,2513.28 8501.72,2525 8698.28,2525 8710,2513.28 R44.2@8710,2475 ; R43.2@8490.94,1875 8490,1875.94 8490,1925 ; R42.2@8490.94,2175 8490,2175.94 8490,2225 ; R42.2@8500,2175 8496.85,2175 8450,2128.15 P21.1@8450,2075 8450,1965 8490,1925 ; R41.2@8500,2475 8496.85,2475 8450,2428.15 P20.1@8450,2375 8450,2325 8490,2285 8490,2225 ; R46.2@8710,1875 8710,1913.28 8698.28,1925 8490,1925 ; R45.2@8710,2195 8710,2213.28 8698.28,2225 8490,2225
  Bottom Layer w30: R36.1@9100,1975 v1(9150,1975) ; R35.1@9100,2275 v1(9150,2275) ; R34.1@9100,2575 v1(9150,2575)
  Bottom Layer w55: 2900,2200 3529.85,2200 3565,2235.15 v3(3565,2525) ; v3(5175,2650) P12.5@5350,2650
  Bottom Layer w80: P23.1@2900,1475 P16.1@2900,1750 P14.1@2900,2025 2900,2200 P15.1@2900,2300 P24.1@2900,2575
+5: C7.2 C8.2 J1.5 P5.2 P6.2 P7.2 P8.2 P13.2 P13.4 P25.1 R2.1 R2.2 R2.3 R2.4 R3.1 R3.2 R3.3 R3.4 R4.1 R4.2 R4.3 R4.4 R20.1 R21.1 R22.1 R23.1 R32.2 U11.8 U12.8 | length 15728
  Top Layer w20: 3290,2435 3387,2338 P25.1@3475,2338 ; v1(5000,2640) 5000,2700
  Top Layer w40: R22.1@8195.47,2850 8125,2850 ; R21.1@8195.47,2950 8125,2950 ; R23.1@8250,2570.47 8154.53,2570.47 8125,2600 8125,2850 ; U12.8@8562.2,2800 8525,2800 8500,2825 C8.2@8500,2900 8500,3150 ; U11.8@8562.2,3150 8500,3150 ; P5.2@8900,3575 8900,3525 8875,3500 8750,3500 8575,3325 8500,3325 ; 8125,2850 8125,2950 ; 8125,2950 8125,3100 8175,3150 8175,3200 8202.87,3227.87 8248.35,3227.87 R20.1@8250,3229.53 8251.65,3231.18 8306.18,3231.18 8400,3325 8500,3325 ; 8500,3150 C7.2@8500,3250 8500,3325
  Top Layer w55: v6(7775,1465) 7880,1570
  Top Layer w60: J1.5@2750,2295 2750,2389.85 2785.15,2425 3264.85,2425 3300,2460.15 3300,2614.85 3335.15,2650 4900,2650 4950,2700 5000,2700 5100,2700 5200,2800 6000,2800 6050,2850 v3(7150,2850) ; P13.4@7700,1850 P13.2@7700,1750 7775,1750 7850,1675 7850,1600 7880,1570 7925,1525 v3(8300,1525) ; R2.4@7950,4691.34 R2.3@8000,4691.34 R2.2@8050,4691.34 R2.1@8100,4691.34 v3(8187.5,4691.34)
  Bottom Layer w20: R32.2@4954.53,2425 4975,2425 5000,2450 v1(5000,2640)
  Bottom Layer w55: 7525,1420 7570,1420 7590,1400 7710,1400 v6(7775,1465)
  Bottom Layer w60: v3(7150,2850) 7150,2650 7150,2350 7225,2275 7225,1850 7225,1452.22 7257.22,1420 7525,1420 ; R4.1@7950,4691.34 R4.2@8000,4691.34 R4.3@8050,4691.34 R4.4@8100,4691.34 R3.1@8275,4691.34 R3.2@8325,4691.34 R3.3@8375,4691.34 R3.4@8425,4691.34 8428.24,4691.34 8594.57,4525 8675,4525 8800,4400 8925,4400 9025,4300 9025,3875 8900,3750 P5.2@8900,3575 P6.2@8900,3275 P7.2@8900,2975 P8.2@8900,2675 8901.91,2673.09 8901.91,2623.09 8925,2600 8925,1730 8605,1410 8325,1410 8300,1435 v3(8300,1525)
+12: P5.1 P6.1 P7.1 P8.1 | length 4181.7
  Top Layer w55: v5(6750,1500) 6750,1425 6775,1400 8350,1400 8375,1425 v3(8375,1480)
  Bottom Layer w60: v3(8375,1480) 8570,1480 8825,1735 8825,2575 8801.91,2598.09 8801.91,2673.09 P8.1@8800,2675 P7.1@8800,2975 P6.1@8800,3275 P5.1@8800,3575
+24: F1.1 J1.2 R31.2 | length 3682
  Top Layer w20: v1(2800,1825) 2825,1850 2825,1875 2850,1900 3350,1900 3375,1925 3375,2200 3450,2275 3925,2275 3950,2250 4200,2250 4225,2225 4500,2225 4525,2200 4975,2200 5000,2225 v1(5000,2325)
  Top Layer w80: J1.2@2410,1785 2400,1775 2400,1770 2405,1775 2478.14,1775 2525,1728.14 v1(2525,1650) 2525,1571.86 2571.86,1525 F1.1@2670.67,1525 F1.1@2675,1529.33
  Bottom Layer w15: R31.2@4950,2325 v1(5000,2325)
  Bottom Layer w20: v1(2525,1650) 2525,1800 2550,1825 v1(2800,1825)
+A3.3: C2.2 C3.2 C4.2 C5.2 C6.2 NT2.1 R9.1 R10.2 U2.5 U3.5 U4.5 U5.5 U6.7 U6.13 | length 3473.4
  Top Layer w20: U5.5@3675,1878.15 C5.2@3675,1975 v1(3675,2050) ; U4.5@3975,1878.15 C4.2@3975,1975 v1(3975,2050) ; U3.5@4275,1878.15 C3.2@4275,1975 v1(4275,2050) ; U2.5@4575,1878.15 C2.2@4575,1975 v1(4575,2050) 5025,2050 5050,2025 5050,1875 ; R9.1@4975,1870.47 5045.47,1870.47 5050,1875 ; C6.2@5045.47,1500 5050,1504.53 5050,1550 ; U6.7@5050,1595 5050,1550 ; R10.2@5195.47,1844.69 5207.13,1856.34 5207.13,1882.13 5225,1900 5350,1900 ; R10.2@5195.47,1850 5075,1850 ; U6.13@5273.71,1726.18 5274.85,1725.04 5325.04,1725.04 5350,1750 5350,1900 ; NT2.1@5475,1900 5350,1900 ; 5050,1550 5075,1550 5125,1600 5125,1800 5075,1850 ; 5050,1875 5075,1850
  Bottom Layer w20: v1(3675,2050) v1(3975,2050) v1(4275,2050) v1(4575,2050)
AGND: C2.1 C3.1 C4.1 C5.1 C6.1 NT1.1 R5.2 R6.2 R7.2 R8.2 R11.2 R13.1 R13.2 R13.3 R13.4 U2.2 U3.2 U4.2 U5.2 U6.4
  other v1: 4450,1400 4550,1400 4650,1400 4750,1400 4850,1400 4950,1400 5050,1400 5150,1400 5250,1400 5350,1400 5450,1400 4450,1500 5450,1500 3550,1600 3650,1600 3750,1600 3850,1600 3950,1600 4050,1600 4150,1600 4250,1600 4350,1600 4450,1600 5450,1600 3550,1700 3550,1800 5450,1800 3550,1900 3550,2000 3550,2100 3650,2100 3750,2100 3850,2100 3950,2100 4050,2100 4150,2100 4250,2100 4350,2100 4450,2100 4550,2100 4650,2100 4750,2100 4850,2100 4950,2100 5050,2100 5150,2100 5250,2100 5350,2100 5450,2100
FAULT: P13.7 R18.1 U7.5 U8.5 U9.5 U10.5 | length 7019.8
  Top Layer w15: v1(5825,2875) v1(5975,2875) ; v1(6050,2325) v1(7375,2325)
  Bottom Layer w15: U10.5@2235,2790 2300,2725 3010,2725 3035,2750 3035,2815 3060,2840 3135,2840 U9.5@3185,2790 3185,2750 3210,2725 3960,2725 3985,2750 3985,2815 4010,2840 4085,2840 U8.5@4135,2790 4135,2750 4160,2725 4415,2725 4440,2750 4440,2775 4475,2810 4525,2810 4560,2775 4560,2750 4585,2725 4910,2725 4935,2750 4935,2815 4960,2840 5035,2840 U7.5@5085,2790 5085,2750 5110,2725 5225,2725 5325,2825 5800,2825 5825,2850 v1(5825,2875) R18.1@5825,2970.47 R18.1@5825,2975 ; v1(5975,2875) 6075,2875 6100,2850 6100,2350 6075,2325 v1(6050,2325) ; v1(7375,2325) 7375,2075 7400,2050 P13.7@7600,2050
GND: C1.1 C7.1 C8.1 C9.1 C10.1 C11.1 C12.1 C13.1 C14.1 C15.1 C16.2 C17.1 C18.1 C19.1 C20.1 C21.1 C22.2 C23.2 C24.2 C25.1 D5.2 D6.2 D7.2 J1.3 NT1.2 P5.4 P6.4 P7.4 P8.4 P10.1 P11.1 P12.1 P13.6 P13.9 P13.14 P13.20 P13.25 P13.30 P13.34 P13.39 P14.2 P15.2 P16.2 P17.1 P18.1 P19.1 P20.4 P21.4 P22.4 P23.2 P24.2 P25.3 R14.2 R15.2 R16.2 R17.1 R19.2 R28.1 R29.1 U1.1 U1.2 U1.4 U1.14 U1.25 U7.1 U7.9 U7.13 U8.1 U8.9 U8.13 U9.1 U9.9 U9.13 U10.1 U10.9 U10.13 U11.5 U12.5 U13.2 U13.7 U14.7 U15.7 U16.7 U17.2 U17.7 U18.12 U19.11 U19.14 U20.7 U22.3 U23.3 U24.3 | length 478.8
  Top Layer w20: R19.2@1710,2910.47 1720.9,2899.57 1824.57,2899.57 U10.9@1825,2900 ; R16.2@2660,2910.47 2670.91,2899.57 2774.57,2899.57 U9.9@2775,2900 ; R15.2@3610,2910.47 3620.91,2899.57 3724.57,2899.57 U8.9@3725,2900 ; R14.2@4560,2910.47 4570.9,2899.57 4674.57,2899.57 U7.9@4675,2900
LF_PWM04: D1.3 U1.10 | length 1339.3
  Top Layer w15: D1.3@8460,3605 8480,3605 8530,3555 8620,3555 8650,3585 8650,3655 8720,3725 9120,3725 9150,3755 9150,4165 9126.02,4188.98 U1.10@9065.16,4188.98
LF_PWM05: D1.2 U1.11 | length 1423.7
  Top Layer w15: D1.2@8450,3525 8630,3525 8680,3575 8680,3645 8730,3695 9130,3695 9180,3745 9180,4175 9140,4215 9065.59,4215 U1.11@9065.16,4214.57
LF_PWM06: D1.1 U1.12 | length 1528.8
  Top Layer w15: D1.1@8460,3445 8480,3445 8530,3495 8640,3495 8710,3565 8710,3635 8740,3665 9140,3665 9210,3735 9210,4185 9154.84,4240.16 U1.12@9065.16,4240.16
LF_PWM07: D2.3 U1.13 | length 993.5
  Top Layer w15: D2.3@8450,3905 v1(8490,3905) ; v1(8890,4235) 8940,4235 8970.75,4265.75 U1.13@9065.16,4265.75
  Bottom Layer w15: v1(8490,3905) 8490,3885 8520,3855 8810,3855 8890,3935 v1(8890,4235)
LF_PWM08: D2.2 U1.15 | length 1052.9
  Top Layer w15: D2.2@8450,3825 v1(8490,3825) ; v1(8780,4295) 8834.57,4295 U1.15@8834.84,4295.28
  Bottom Layer w15: v1(8490,3825) 8820,3825 8920,3925 8920,4255 8880,4295 v1(8780,4295)
LF_PWM09: D2.1 U1.16 | length 1290.4
  Top Layer w15: D2.1@8450,3745 v1(8490,3745) ; v1(8750,4265) 8834.09,4265 U1.16@8834.84,4265.75
  Bottom Layer w15: v1(8490,3745) 8490,3765 8520,3795 8830,3795 8950,3915 8950,4265 8890,4325 8770,4325 8750,4305 v1(8750,4265)
LF_PWM10: D3.3 U1.17 | length 399.4
  Top Layer w15: D3.3@8450,4205 8480,4205 8515,4240 8834.68,4240 U1.17@8834.84,4240.16
LF_PWM11: D3.2 U1.18 | length 439.5
  Top Layer w15: D3.2@8450,4125 8470,4125 8500,4155 8500,4185 8529.57,4214.57 U1.18@8834.84,4214.57
LF_PWM12: D3.1 U1.19 | length 485.5
  Top Layer w15: D3.1@8450,4045 8470,4045 8500,4075 8500,4115 8530,4145 8530,4175 8543.98,4188.98 U1.19@8834.84,4188.98
LF_PWM13: D4.3 U1.20 | length 675.6
  Top Layer w15: D4.3@8460,4505 8480,4505 8530,4455 v1(8650,4455) ; v1(8690,4155) 8698.39,4163.39 U1.20@8834.84,4163.39
  Bottom Layer w15: v1(8650,4455) 8650,4225 8690,4185 v1(8690,4155)
LF_PWM14: D4.2 U1.21 | length 708.4
  Top Layer w15: D4.2@8408.27,4425 v1(8680,4425) ; v1(8720,4125) 8732.8,4137.8 U1.21@8834.84,4137.8
  Bottom Layer w15: v1(8680,4425) 8680,4235 8720,4195 v1(8720,4125)
LF_PWM15: D4.1 U1.22 | length 679.2
  Top Layer w15: D4.1@8460,4345 8480,4345 8530,4395 v1(8710,4395) ; v1(8750,4095) 8752.71,4095 8769.91,4112.21 U1.22@8834.84,4112.21
  Bottom Layer w15: v1(8710,4395) 8710,4245 8750,4205 v1(8750,4095)
MOTOR_ANALOGUE_0: R12.1 R13.8 U2.1 | length 533.6
  Top Layer w15: U2.1@4537.6,1771.85 4537.6,1745 4556.42,1726.18 R12.1@4832.57,1726.18 ; R13.8@4623.82,1521.06 v1(4623.82,1591.81)
  Bottom Layer w15: v1(4623.82,1591.81) v1@4623.82,1725
  other v1: 4623.82,1725.41
MOTOR_ANALOGUE_1: R12.2 R13.7 U3.1 | length 815.5
  Top Layer w15: U3.1@4237.6,1771.85 4240,1769.45 4240,1740 4255,1725 4510,1725 4544.25,1690.75 v1(4659.25,1690.75) R12.2@4832.57,1690.75 ; R13.7@4659.25,1521.06 v1(4659.25,1564.37)
  Bottom Layer w15: v1(4659.25,1564.37) v1(4659.25,1690.75)
MOTOR_ANALOGUE_2: R12.3 R13.6 U4.1 | length 1089.2
  Top Layer w15: U4.1@3940,1765 3940,1740 3955,1725 4205,1725 4240,1690 4499.25,1690 4530,1659.25 v1(4690.75,1659.25) R12.3@4832.57,1659.25 ; R13.6@4690.75,1521.06 v1(4690.75,1591.81)
  Bottom Layer w15: v1(4690.75,1591.81) v1(4690.75,1659.25)
MOTOR_ANALOGUE_3: R12.4 R13.5 U5.1 | length 1359.1
  Top Layer w15: U5.1@3640,1765 3640,1740 3655,1725 3905,1725 3940,1690 4190,1690 4225,1655 4485,1655 4516.18,1623.82 4725,1623.82 ; R13.5@4726.18,1530.91 4726.18,1622.64 4725,1623.82 ; R12.4@4832.57,1623.82 4725,1623.82
NetC14_2: C14.2 C15.2 U19.15 | length 211.8
  Bottom Layer w15: C15.2@4020.47,2354.53 C15.2@4025,2350 ; C14.2@4020.47,2425 4020.47,2420.47 C14.2@4025,2425
  Bottom Layer w20: U19.15@3896.46,2350 C15.2@4025,2350 ; C15.2@4020.47,2354.53 C14.2@4020.47,2420.47
NetC17_2: C17.2 P17.2 R34.2 U20.1 | length 1622
  Top Layer w20: U20.1@7925,2125 7925,2200 7950,2225 9075,2225 9100,2250 P17.2@9100,2375
  Bottom Layer w20: R34.2@9040,2555 9040,2536.72 9051.72,2525 9088.28,2525 9100,2513.28 C17.2@9100,2475 P17.2@9100,2375
NetC18_2: C18.2 P18.2 R35.2 U20.3 | length 1422
  Top Layer w20: U20.3@8025,2125 8025,2150 8050,2175 9075,2175 9100,2150 P18.2@9100,2075
  Bottom Layer w20: R35.2@9040,2255 9040,2236.72 9051.72,2225 9088.28,2225 9100,2213.28 C18.2@9100,2175 P18.2@9100,2075